# EAGLE board k1fm-pico-balloon-v1.1 (EAGLE 9.4.1)
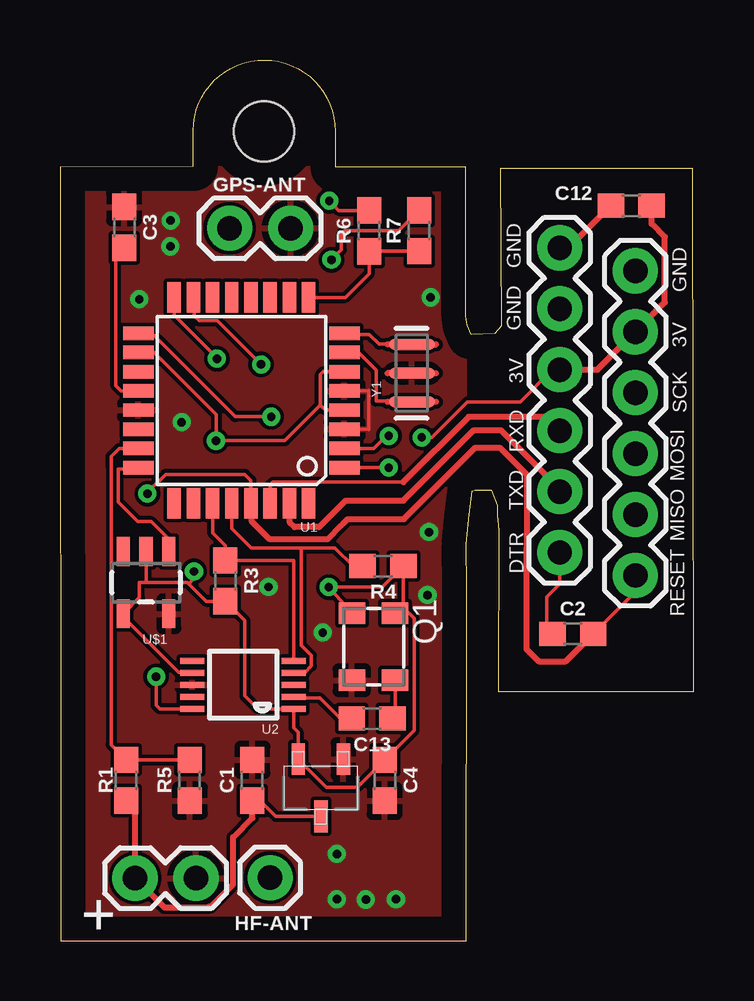
[diagram p0: board, top side]
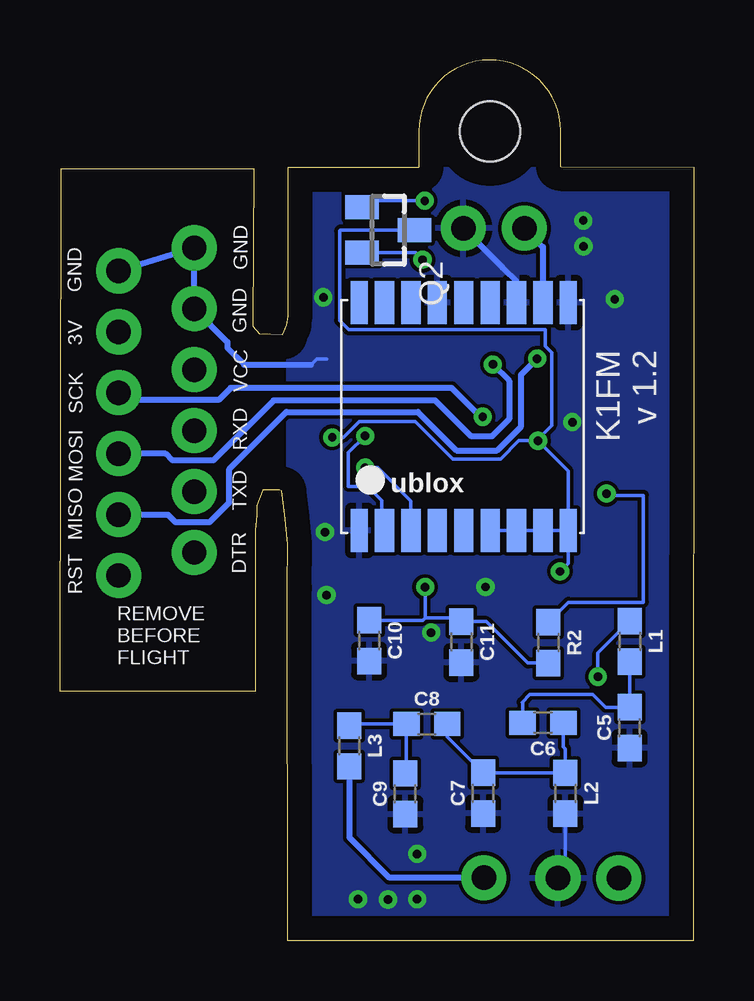
[diagram p1: board, bottom side, seen from below]

Size 26.41 x 36.72 mm. Coordinates in mm from the lower left corner, seen from the top.
Outline: 0.02,0 16.93,0 16.94,14.72 16.93,16.53 17.03,17.58 17.08,17.94 17.17,18.74 17.29,18.79 17.96,18.8 18.22,18.15 18.22,18.04 18.22,17.75 18.28,17.11 18.29,17.09 18.27,10.39 26.41,10.39 26.37,32.19 18.35,32.18 18.38,25.62 18.12,25.31 17.13,25.27 16.96,25.67 16.91,26.05 16.91,32.24 11.46,32.24 11.46,33.74 arc180 5.55,33.78 5.55,32.28 0,32.24 0.02,0
Copper layers (1*16): Top 0.035mm / dielectric 0.15mm / Bottom 0.035mm
Design rules "default": minimum track width 6mil, minimum drill 0.35mm, track to track 6mil, track to pad 6mil, pad to pad 6mil, via to via 6mil, smd to smd 6mil, copper to edge 40mil, drill to drill 6mil, minimum pad ring 10mil, minimum via ring 8mil, stop-mask expansion 4mil, vias tented up to drill 0mil, thermal gap 10mil
Net classes: 1 vcc: width 0.254 mm
Holes 2.5 mm at 8.5,33.74

## Footprints (pad centres in the part's own frame; a part is rotated, then mirrored left to right if it is on the bottom)
1X02 = drill 1.016 pad 1.88: 1 0,0; 2 2.54,0
0603 = smd 1.1 x 1: 1 -0.85,0; 2 0.85,0
UBLOX_MAX = smd 1.8 x 0.7: 1_GND 4.95,-4.4; 9_V_RESET 4.95,4.3; 10_GND -4.55,4.3; 18_RESERVED -4.55,-4.4 | smd 1.8 x 0.8: 2_TXD1 4.95,-3.35; 3_RXD1 4.95,-2.25; 4_TIMEPULSE 4.95,-1.15; 5_EXTINT0 4.95,-0.05; 6_V_BCKP 4.95,1.05; 7_VCC_IO 4.95,2.15; 8_VCC 4.95,3.25; 11_RF_IN -4.55,3.25; 12_GND -4.55,2.15; 13_ANTON -4.55,1.05; 14_VCC_RF -4.55,-0.05; 15_RESERVED -4.55,-1.15; 16_SDA2 -4.55,-2.25; 17_SCL2 -4.55,-3.35
1X01 = drill 1.016 pad 1.88: 1 0,0
1X06 = drill 1.016 pad 1.88: 1 0,0; 2 2.54,0; 3 5.08,0; 4 7.62,0; 5 10.16,0; 6 12.7,0
3.2X2.5_KXO-84 = smd 0.9 x 1.1: 1 -1.4,-0.9; 2 1.4,-0.9; 3 1.4,0.9; 4 -1.4,0.9
SOT23 = smd 1 x 1.4: 1 -0.95,-1.1; 2 0.95,-1.1; 3 0,1.1
TQFP32-08 = smd 1.27 x 0.559: 1 -4.293,2.8; 2 -4.293,2; 3 -4.293,1.2; 4 -4.293,0.4; 5 -4.293,-0.4; 6 -4.293,-1.2; 7 -4.293,-2; 8 -4.293,-2.8; 17 4.293,-2.8; 18 4.293,-2; 19 4.293,-1.2; 20 4.293,-0.4; 21 4.293,0.4; 22 4.293,1.2; 23 4.293,2; 24 4.293,2.8 | smd 0.559 x 1.27: 9 -2.8,-4.293; 10 -2,-4.293; 11 -1.2,-4.293; 12 -0.4,-4.293; 13 0.4,-4.293; 14 1.2,-4.293; 15 2,-4.293; 16 2.8,-4.293; 25 2.8,4.293; 26 2,4.293; 27 1.2,4.293; 28 0.4,4.293; 29 -0.4,4.293; 30 -1.2,4.293; 31 -2,4.293; 32 -2.8,4.293
MSOP10 = smd 0.25 x 1: 1 -1,-2.113; 2 -0.5,-2.113; 3 0,-2.113; 4 0.5,-2.113; 5 1,-2.113; 6 1,2.113; 7 0.5,2.113; 8 0,2.113; 9 -0.5,2.113; 10 -1,2.113
SOT-23A_MC = smd 0.559 x 1.321: 1 -0.94,-1.194; 2 0.94,-1.194; 3 0,1.194
SOT-23 = smd 0.55 x 1.2: 1 -0.95,-1.3; 2 0,-1.3; 3 0.95,-1.3; 4 0.95,1.3; 5 -0.95,1.3
RESONATOR-SMD-1:1 = smd 0.45 x 1.905: 1 -1.2,0; 2 0,0; 3 1.2,0

## Placement (x,y rotation side)
3.3V  3.3V  [1X02]  3.13,2.61 0 top
C1  1.0uF  [0603]  8.01,6.69 90 top
C2  0.1uF  [0603]  21.37,12.79 0 top
C3  0.1uF  [0603]  2.67,29.74 270 top
C4  1.0uF  [0603]  13.53,6.69 270 top
C5  56pF  [0603]  2.68,8.88 90 bottom
C6  18pF  [0603]  6.29,9.09 180 bottom
C7  47pF  [0603]  8.78,6.15 90 bottom
C8  18pF  [0603]  11.13,9.03 0 bottom
C9  56pF  [0603]  12.03,6.13 90 bottom
C10  0.47uF  [0603]  13.53,12.51 270 bottom
C11  0.47uF  [0603]  9.69,12.45 270 bottom
C12  1.0uF  [0603]  23.8,30.64 180 top
C13  10nF  [0603]  13,9.27 180 top
GPS1  UBLOX_MAX  [UBLOX_MAX]  9.54,22.06 270 bottom
GPS-ANT  GPS ANT  [1X02]  9.61,29.7 180 top
HF-ANT  HF ANT  [1X01]  8.75,2.63 0 top
J2  [1X06]  20.82,16.18 90 top
J3  [1X06]  23.97,27.93 270 top
L1  1.5uH  [0603]  2.68,12.48 270 bottom
L2  1.5uH  [0603]  5.36,6.15 270 bottom
L3  1.5uH  [0603]  14.37,8.12 270 bottom
Q1  ASTX-H11-25.000MHZ-T  [3.2X2.5_KXO-84]  13.06,12.26 270 top
Q2  DMP2305U  [SOT23]  12.74,29.63 270 bottom
R1  10k  [0603]  2.76,6.69 90 top
R2  10k  [0603]  6.06,12.43 270 bottom
R3  4.7k  [0603]  6.89,15 270 top
R4  4.7k  [0603]  13.46,15.63 180 top
R5  10k  [0603]  5.41,6.69 90 top
R6  150  [0603]  12.88,29.59 90 top
R7  10k  [0603]  14.97,29.6 90 top
U1  ATMEGA328  [TQFP32-08]  7.56,22.52 180 top
U2  Si5351A-B-GT  [MSOP10]  7.63,10.67 90 top
U3  MCP1754X-XXXXX/C  [SOT-23A_MC]  10.87,6.38 180 top
U$1  TMP36  [SOT-23]  3.59,14.93 180 top
Y1  8/16/20MHz  [RESONATOR-SMD-1:1]  14.66,23.66 90 top

## Library data of the parts
3.3V GPS-ANT HF-ANT J2 = SparkFun-Connectors
C1 C4 C12 = SparkFun-Capacitors; PROD_ID: CAP-00868
C2 C3 C5-C11 = SparkFun-Capacitors; PROD_ID: CAP-08604
C13 = SparkFun-Capacitors; PROD_ID: CAP-00867
GPS1 = Ava
J3 = SparkFun-Connectors; PROD_ID: CONN-08437
L1-L3 = SparkFun-Coils; PROD_ID: NDUC-07874
Q1 = crystal-geyer_V1_0
Q2 = transistor-fet
R1 R2 R5-R7 = SparkFun-Resistors; PROD_ID: RES-00824
R3 R4 = SparkFun-Resistors; PROD_ID: RES-07857
U1 = SparkFun
U2 = microbuilder
U3 = MCP1754
U$1 = TMP36
Y1 = Testing

## Nets
3V: C4.1 C10.1 C11.1 C12.1 GPS1.6_V_BCKP GPS1.7_VCC_IO GPS1.8_VCC GPS1.9_V_RESET J2.4 J3.2 Q1.1 Q1.4 Q2.3 R2.2 R3.2 R4.1 U1.4 U1.6 U1.18 U2.1 U2.7 U3.2 U$1.2 U$1.4
ANT: HF-ANT.1 L3.2
AREF: C3.2 U1.20
CLK0: L1.1 U2.10
D3: GPS1.3_RXD1 U1.1
D4: GPS1.2_TXD1 U1.2
DTR: C2.1 J2.1
GND: 3.3V.2 C1.2 C3.1 C4.2 C5.1 C7.1 C9.1 C10.2 C11.2 C12.2 GPS1.1_GND GPS1.10_GND GPS1.12_GND GPS1.15_RESERVED GPS-ANT.1 J2.5 J2.6 J3.1 L2.2 Q1.2 R5.1 U1.3 U1.5 U1.21 U2.8 U3.1 U$1.5 Y1.2
GPS_E: R6.1 R7.1 U1.9
MISO: J3.5 U1.16
MOSI: J3.4 U1.15
N$1: C13.1 Q1.3
N$2: C13.2 U2.2
N$3: Q2.2 R7.2
N$4: R1.2 R5.2 U1.23
N$5: Q2.1 R6.2
N$6: GPS1.11_RF_IN GPS-ANT.2
N$9: C6.1 C7.2 C8.2 L2.1
N$12: C5.2 C6.2 L1.2
N$13: C8.1 C9.2 L3.1
N$28: U1.8 Y1.3
N$29: U1.7 Y1.1
RESET: C2.2 J3.6 R2.1 U1.29
RXI: J2.3 U1.30
SCK: J3.3 U1.17
SCL: R4.2 U1.28 U2.4
SDA: R3.1 U1.27 U2.5
TEMP: U1.24 U$1.1
TXO: J2.2 U1.31
VDD: 3.3V.1 C1.1 R1.1 U3.3

## Tracks (layer width: path | path; a pad name or v marks a point on that pad's centre or on a via)
3V  (via drill 0.35)
  Top 0.152: 10.85,22.32 10.85,23.61 10.96,23.72 U1.6 | 10.85,22.32 11.05,22.12 U1.4 11.87,22.11 | U1.18 3.92,24.52 6.5,21.94 v6.5,20.84 9.37,20.84 10.85,22.32 | 3.59,14.94 U$1.2 | 3.59,14.94 3.31,14.94 3.31,14.3 U$1.4 2.64,13.5 4.96,11.18 U2.7 | 3.59,14.94 5.29,14.94 5.36,14.88 | 5.36,14.88 6.08,14.15 R3.2 7.7,13.34 7.7,10.2 8.23,9.67 U2.1 9.75,8.87 9.93,8.69 U3.2 11.09,6.4 12.39,6.4 13.46,7.47 | 13.46,7.47 C4.1 14.76,8.77 14.76,13.44 14.54,13.66 Q1.4 14.31,14.01 R4.1 13.43,14.74 v11.2,14.74 Q1.1 | 15.48,20.98 v15.07,20.98 15.48,20.98 16.97,22.47 19.18,22.47 20.52,23.81 J2.4 | 13.81,7.47 13.46,7.47 | v5.58,15.4 5.58,15.11 5.36,14.88
  Top 0.254: J2.4 22.39,23.81 J3.2 25.2,26.62 25.2,29.34 24.65,29.89 C12.1
  Bottom 0.152: v15.07,20.98 14.62,20.98 13.95,21.65 11.61,21.65 10.05,20.09 8.05,20.09 7.3,20.84 6.56,20.84 | 6.56,20.84 v6.5,20.84 5.24,19.59 GPS1.9_V_RESET | 8.38,16.99 GPS1.6_V_BCKP GPS1.7_VCC_IO GPS1.8_VCC GPS1.9_V_RESET | C11.1 9.74,13.3 | R2.2 6.92,11.58 8.65,13.3 9.74,13.3 | 6.56,20.84 5.93,21.48 5.93,24.52 6.19,24.78 6.19,25.48 14.39,25.48 14.76,25.86 14.76,29.6 14.74,29.63 Q2.3 11.45,29.44 11.31,29.44 11.31,29.25 | GPS1.9_V_RESET 5.24,15.74 v5.58,15.4 | v11.2,14.74 11.21,14.73 11.2,14.72 11.2,13.46 | 13.35,13.36 C10.1 11.3,13.36 11.2,13.46 | 11.2,13.46 9.89,13.46 9.74,13.3
ANT
  Bottom 0.254: HF-ANT.1 12.69,2.63 14.35,4.29 14.35,7.25 L3.2
AREF
  Top 0.152: U1.20 2.54,22.92 2.32,23.14 2.32,28.54 C3.2
CLK0  (via drill 0.35)
  Top 0.152: U2.10 4.15,9.67 4,9.82 v4,11.01
  Bottom 0.152: 3.09,13.74 L1.1 4,12 v4,11.01
D3  (via drill 0.35)
  Top 0.152: v13.7,19.72 U1.1
  Bottom 0.152: 11.9,17.21 GPS1.3_RXD1 11.79,18.34 13.18,19.72 v13.7,19.72
D4  (via drill 0.35)
  Top 0.152: U1.2 13.08,20.52 13.6,21.04 v13.7,21.04
  Bottom 0.152: GPS1.2_TXD1 13,17.21 13,18.34 13.6,18.94 14.4,18.94 14.4,20.34 v13.7,21.04
DTR
  Top 0.152: J2.1 20.82,14.88 20.29,14.34 20.29,13.02 C2.1
GND  (via drill 0.35)
  Top 0.152: 13.73,23.63 Y1.2 13.61,23.66 | U1.5 12.87,22.93 12.86,21.31 U1.3
  Top 0.254: C12.2 21.2,28.89 J2.6
  Bottom 0.152: 15.3,24.24 15.71,24.24 15.95,24.01 | L2.2 5.36,2.92 3.3V.2
  Bottom 0.25: J2.5 19.44,24.97 19.44,24.71 18.74,24.01 15.95,24.01
  Bottom 0.254: GPS-ANT.1 7.97,28.06 7.97,28.05 7.39,27.47 GPS1.12_GND | J2.5 J2.6 J3.1
  other vias: 11.54,1.73 12.75,1.72 14,1.73 11.54,3.62 4.6,28.94 3.3,26.74 5.07,21.62 8.69,14.75 10.95,12.85 15.38,17.04 15.44,26.82 15.31,14.41 4.61,30.02
  pour Top: 0,32.22 16.89,32.22 16.89,32.23 16.89,0 16.93,0.04 16.93,-0.02 0.04,-0.02 0.02,0
  pour Bottom: -0.02,32.19 16.93,32.19 16.93,0 16.94,-0.02 0.05,-0.02 0,0.03
GPS_E
  Top 0.152: U1.9 11.89,26.82 12.88,27.8 R6.1 R7.1
MISO  (via drill 0.35)
  Top 0.152: 4.74,26.8 U1.16 4.76,26.09 6.54,24.31 v6.54,24.27
  Bottom 0.254: J3.5 21.91,17.77 21.61,17.46 20.18,17.46 19.35,18.28 19.35,19.67 16.98,22.04 11.5,22.04 9.9,20.44 8.2,20.44 7.2,21.44 7.2,23.6 v6.54,24.27
MOSI  (via drill 0.35)
  Top 0.152: 5.58,26.82 U1.15 5.6,26.78 5.6,26.04 5.8,25.84 6.56,25.84 v8.38,24.02
  Bottom 0.254: J3.4 22.02,20.31 21.73,20.02 20.02,20.02 17.51,22.53 10.79,22.53 9.28,21.02 8.42,21.02 7.7,21.74 7.7,23.34 v8.38,24.02
N$1
  Top 0.152: Q1.3 13.96,9.38 C13.1
N$2
  Top 0.152: C13.2 11.68,9.27 10.83,10.12 9.8,10.12 U2.2
N$3  (via drill 0.35)
  Top 0.152: v11.31,28.39 11.73,28.81 11.73,29.47 11.86,29.6 14.12,29.6 R7.2
  Bottom 0.152: Q2.2 11.6,28.68 v11.31,28.39
N$4
  Top 0.152: 2.79,7.51 R1.2 | U1.23 2.47,20.52 2.13,20.19 2.13,19.79 2.13,8.17 R1.2 | R1.2 R5.2
N$5  (via drill 0.35)
  Top 0.152: v11.22,30.85 11.62,30.44 R6.2
  Bottom 0.152: Q2.1 13.56,30.85 v11.22,30.85
N$6
  Bottom 0.254: GPS-ANT.2 6.29,28.92 GPS1.11_RF_IN
N$9
  Bottom 0.152: C6.1 5.44,8.08 5.36,8 L2.1 C7.2 10.28,8.5 C8.2
N$12
  Bottom 0.152: 2.7,9.74 C5.2 | C5.2 3.68,9.73 4.22,10.27 6.84,10.27 7.16,9.94 7.14,9.92 C6.2 | C5.2 L1.2
N$13
  Bottom 0.152: C9.2 11.98,7.03 C8.1 14.31,9.03 L3.1
N$28
  Top 0.152: U1.8 11.9,25.28 12.89,25.28 13.29,24.87 Y1.3
N$29
  Top 0.152: U1.7 | U1.7 12.44,24.52 13.18,23.79 13.18,23.05 13.18,22.93 13.18,22.8 13.17,22.49 14.63,22.49 Y1.1
RESET  (via drill 0.35)
  Top 0.152: C2.2 23.97,14.55 J3.6 | 7.98,18.21 U1.29 7.96,19.19 7.7,19.44 4.4,19.44 3.64,18.69 v3.64,18.64 | 11.79,17.38 11.71,17.3 | 19.44,16.38
  Top 0.254: C2.2 21.08,11.65 19.94,11.65 19.44,12.15 19.44,16.38 | 7.98,18.21 7.98,17.51 8.75,16.73 11.15,16.73 11.71,17.3 | 11.79,17.38 11.98,17.58 14.33,17.58 17.31,20.55 18.32,20.55 19.44,19.43 19.44,16.38
  Bottom 0.152: R2.1 5.23,14.11 2.11,14.11 | 2.11,14.11 | 2.11,14.11 2.1,18.57 3.57,18.57 v3.64,18.64
RXI
  Top 0.152: U1.30 8.76,19 8.87,19.12 14.31,19.12
  Top 0.254: J2.3 20.25,21.83 17.03,21.83 14.31,19.12
SCK  (via drill 0.35)
  Top 0.152: U1.17 3.82,25.32 7.3,21.84 v8.8,21.84
  Bottom 0.152: v8.8,21.84 8.9,21.84
  Bottom 0.25: 8.9,21.84 10.1,23.04 19.3,23.04 19.8,22.54 23.67,22.54 J3.3
SCL
  Top 0.152: 7.16,17.66 U1.28 7.16,17.18 7.96,16.38 10.05,16.38 | 12.56,15.58 R4.2 12.21,15.63 11.46,16.38 11.3,16.38 11.29,16.38 10.05,16.38 | 10.05,16.38 10.05,12.32 10.47,11.89 10.47,11.45 10.19,11.17 U2.4
SDA
  Top 0.152: U1.27 6.36,17.01 6.89,16.47 R3.1 9.74,15.85 U2.5
TEMP
  Top 0.152: U$1.1 4.54,16.75 3.81,17.48 3.25,17.48 2.44,18.29 2.44,19.66 3.2,19.66 U1.24
TXO
  Top 0.254: U1.31 9.56,17.46 9.78,17.24 10.8,17.24 11.9,18.35 14.3,18.35 17.25,21.29 18.37,21.29 20.82,18.84 J2.2
VDD
  Top 0.152: C1.1 8.34,5.84 8.99,5.18 U3.3
  Top 0.254: R1.1 3.13,5.48 3.3V.1 4.35,1.39 6.17,1.39 6.2,1.42 6.29,1.42 7.21,2.35 7.21,4.32 8.01,5.11 C1.1

## Text on the board
tPlace: GND | GND | GND | 3V | 3V | SCK | RXD | MOSI | MISO | TXD | DTR | RESET
tNames: +
bNames: GND | GND | 3V | GND | K1FM / v 1.2 | VCC | SCK | MOSI | RXD | MISO | TXD | RST | DTR | REMOVE / BEFORE / FLIGHT